# Allegro board lora.brd
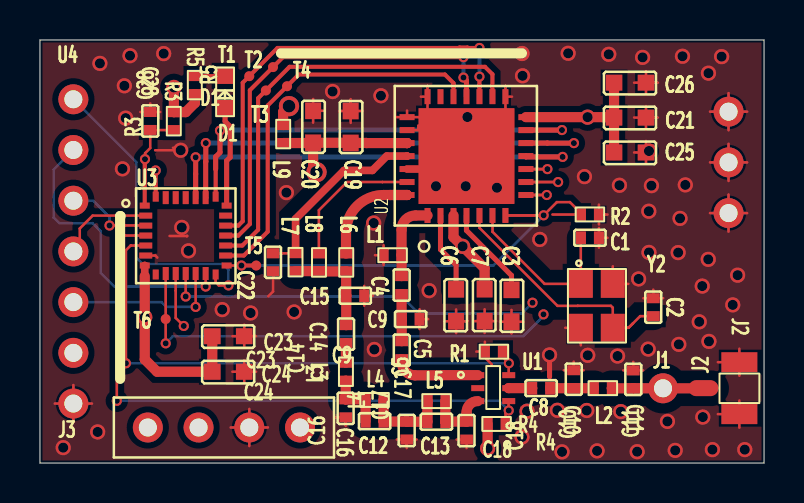
[diagram p0: board, top side]
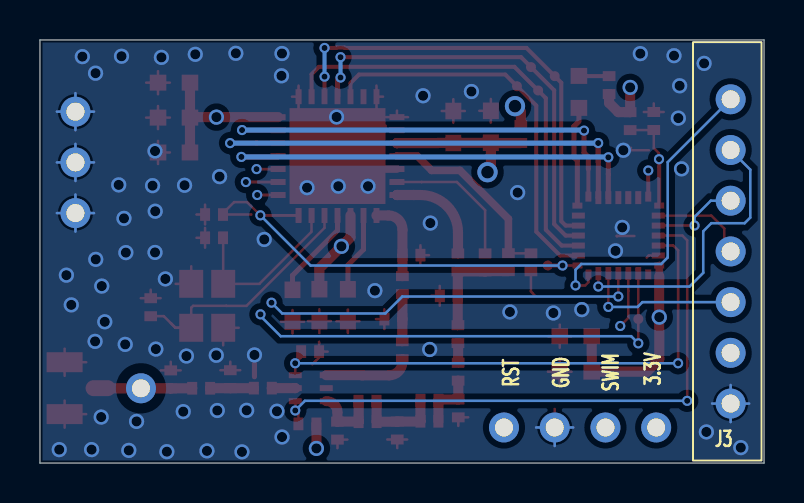
[diagram p1: board, bottom side, seen from below]

Outline 36.25 x 21.19 mm; copper layers: TOP, GND, POWER, BOTTOM. Coordinates in mm from the lower left corner of the outline.
Outline path: 0,21.19 0,0 36.25,0 36.25,21.19 0,21.19

## Placement (name value [footprint] x y rotation side)
C1  15P  [C0402]  27.08 11.28 0 top
C2  15P  [C0402]  30.7 7.36 90 top
C3  0.1uF  [C0603]  23.61 8.68 270 top
C4  4.7p  [C0402]  18.1 9.36 270 top
C5  47p  [C0402]  18.11 6.1 270 top
C6  0.1uF  [C0603]  20.83 7.1 90 top
C7  0.1uF  [C0603]  22.26 7.11 90 top
C8  47p  [C0402]  24.64 3.75 0 top
C9  NC  [C0402]  18.11 7.21 0 top
C10  NC  [C0402]  26.72 4.65 270 top
C11  NC  [C0402]  29.7 4.64 270 top
C12  2.7p  [C0402]  16.3 2.09 0 top
C13  NC  [C0402]  19.39 2.07 0 top
C14  47p  [C0402]  15.32 6.91 270 top
C15  8.2P  [C0402]  15.33 8.38 0 top
C16  15P  [C0402]  15.31 2.29 90 top
C17  12p  [C0402]  18.36 1.18 90 top
C18  4.7p  [C0402]  21.36 1.18 90 top
C19  10uF  [C0603]  15.56 17.63 270 top
C20  0.1uF  [C0603]  13.68 17.64 270 top
C21  10uF  [C0603]  30.34 17.3 180 top
C22  8.2P  [C0402]  11.67 9.61 90 top
C23  10uF  [C0603]  10.23 6.35 180 top
C24  0.1uF  [C0603]  10.23 4.58 180 top
C25  10uF  [C0603]  30.34 15.56 180 top
C26  0.1uF  [C0603]  30.34 19.05 180 top
C28  47p  [C0402]  5.52 17.58 270 top
D1  F5F1  [LED0603]  9.27 17.79 90 top
J1  CON1  [ANT_HOLE]  31.19 3.75 0 top
J2  -  [IPX]  33.21 3.75 270 top
J3  -  [CON4]  5.4 1.78 0 top
L1  18nH  [R0402]  18.1 10.41 180 top
L2  0  [R0402]  27.73 3.75 0 top
L3  22nH  [R0402]  15.31 5.03 270 top
L4  12nH  [R0402]  16.3 3.16 0 top
L5  0  [R0402]  19.41 3.1 0 top
L6  2.2nH  [R0402]  15.33 10.5 270 top
L7  47nH  [R0402]  12.8 9.61 90 top
L8  33nH  [R0402]  13.96 10.5 270 top
L9  33nH  [R0402]  12.17 16.93 270 top
R1  10K  [R0402]  23.17 5.58 180 top
R2  10K  [R0402]  27.08 12.45 0 top
R3  10K  [R0402]  6.7 16.68 90 top
R4  10K  [R0402]  23.31 1.96 180 top
R5  1K  [R0402]  7.76 18.48 90 top
T1  TEST  [TP1]  10.48 19.38 0 top
T2  TEST  [TP1]  11.67 19.83 0 top
T3  TEST  [TP1]  11.31 18.66 0 top
T4  TEST  [TP1]  12.37 18.87 0 top
T5  TEST  [TP1]  10.82 9.89 0 top
T6  TEST  [TP1]  6.29 7.21 0 top
U1  PE4259  [SC-70]  21.92 4.4 0 top
U2  SX1278  [QFN28_LEAD]  19.64 10.77 90 top
U3  STM8L151G6U6  [QFN28_NOLEAD]  7.3 11.39 0 top
U4  -  [E32-TTL-100]  34.17 12.52 90 top
Y2  FTR5092-A2-32MHZ  [CRY_3225]  28.68 8.98 270 top

## Library data of the parts
C1-C26 C28 = CAP NP
D1 = F5F1
J1 = CON1
J2 = IPX
J3 = CON4
L1-L9 = INDUCTOR
R1-R5 = RESISTOR
T1-T6 = TEST
U1 = PE4259
U2 = SX1278
U3 = STM8L151G6U6
U4 = E32-TTL-100
Y2 = CRY_0

## Footprints (pads in the part's own frame, mm; a bottom-side part is the same pattern mirrored in y, then rotated)
ANT_HOLE
  round 1.5 hole 0.9: 1(0,0)
C0402
  rect 0.5x0.635 smd: 1(0,0) 2(0.9,0)
C0603
  rect 0.83x0.8 smd: 1(0,0) 2(1.6,0)
CON4
  round 1.5 hole 0.9: 1(0,0) 2(2.54,0) 3(5.08,0) 4(7.62,0)
CRY_3225
  rect 1.4x1.2 smd: 1(0,-1.6) 2(2.2,-1.6) 3(2.2,0) 4(0,0)
E32-TTL-100
  round 1.5 hole 0.9: 1(5.7,32.5) 2(3.16,32.5) 3(0.62,32.5) 4(-1.92,32.5) 5(-4.46,32.5) 6(-7,32.5) 7(-9.54,32.5) 8(0,-0.3) 9(2.54,-0.3) 10(5.08,-0.3)
IPX
  oval 0.8x1.5 smd: 1(0,0)
  rect 1x1.8 smd: 2(1.3,1.8) 3(-1.3,1.8)
LED0603
  rect 0.8x0.83 smd: 1(0,0) 2(1.6,0)
QFN28_LEAD
  rect 0.75x0.3 smd: 1(1.633,0.237) 2(1.633,-0.413) 3(1.633,-1.063) 4(1.633,-1.713) 5(1.633,-2.363) 6(1.633,-3.013) 7(1.633,-3.663) 15(7.583,-3.663) 16(7.583,-3.013) 17(7.583,-2.363) 18(7.583,-1.713) 19(7.583,-1.063) 20(7.583,-0.413) 21(7.583,0.237)
  rect 0.3x0.75 smd: 8(2.658,-4.688) 9(3.308,-4.688) 10(3.958,-4.688) 11(4.608,-4.688) 12(5.258,-4.688) 13(5.908,-4.688) 14(6.558,-4.688) 22(6.558,1.262) 23(5.908,1.262) 24(5.258,1.262) 25(4.608,1.262) 26(3.958,1.262) 27(3.308,1.262) 28(2.658,1.262)
  rect 4.8x4.8 smd: 29(4.608,-1.713)
QFN28_NOLEAD
  rect 0.5x0.3 smd: 1(-2.05,1.5) 7(-2.05,-1.5) 15(2.05,-1.5) 21(2.05,1.5)
  rect 0.65x0.3 smd: 2(-2,1) 3(-2,0.5) 4(-2,0) 5(-2,-0.5) 6(-2,-1) 16(2,-1) 17(2,-0.5) 18(2,0) 19(2,0.5) 20(2,1)
  rect 0.3x0.5 smd: 8(-1.5,-1.95) 14(1.5,-1.95) 22(1.5,1.95) 28(-1.5,1.95)
  rect 0.3x0.65 smd: 9(-1,-1.9) 10(-0.5,-1.9) 11(0,-1.9) 12(0.5,-1.9) 13(1,-1.9) 23(1,1.9) 24(0.5,1.9) 25(0,1.9) 26(-0.5,1.9) 27(-1,1.9)
R0402
  rect 0.5x0.635 smd: 1(0,0) 2(0.9,0)
SC-70
  rect 0.65x0.3 smd: 1(0,0) 2(0,-0.65) 3(0,-1.3) 4(1.55,-1.3) 5(1.55,-0.65) 6(1.55,0)
TP1
  round 0.5 smd: 1(0,0)

## Nets
GND: C1.2 C2.2 C3.2 C6.1 C7.1 C9.2 C10.1 C11.1 C15.2 C16.1 C17.1 C18.1 C19.1 C20.1 C21.1 C22.1 C23.1 C24.1 C25.1 C26.1 C28.1 J2.2(G#2) J2.3(G#3) J3.3 L1.2 R1.2 R2.2 U2.15(GND#15) U2.21(RFI_HF (GND)) U2.22(RFO_HF (GND)) U2.23(GND#23) U2.26(GND#26) U2.29(GROUND) U3.6(VSS1) U4.7(GND#7) U4.8(GND#8) U4.9(GND#9) U4.10(GND#10) Y2.2(G#2) Y2.4(G#4)
VCC_3.3V: C23.2 C24.2 J3.1 L9.1 R3.2 R5.1 U3.7(VDD1) U4.6(VCC)
VCC_RF: C7.2 C19.2 C20.2 C21.2 C25.2 C26.2 L9.2 R4.2 U2.3(VBAT_ANA) U2.14(VBAT_DIG) U2.24(VBAT_RF)
DIO0: T6.1(TP) U2.8(DIO0) U3.9(PD1)
DIO1: U2.9(DIO1/DCLK) U3.10(PD2)
DIO2: U2.10(DIO2/DATA) U3.11(PD3)
DIO3: U2.11(DIO3) U3.24(PC3)
DIO4: U2.12(DIO4) U3.23(PC2)
DIO5: U2.13(DIO5) U3.22(PC1)
LORA_AUX: U3.12(PB0) U4.5(AUX)
LORA_M0: U3.14(PB2) U4.1(M0)
LORA_M1: U3.13(PB1) U4.2(M1)
LORA_RST: R2.1 T5.1(TP) U2.7(NRESET) U3.15(PB3)
LORA_RXD: U3.3(PA3/UART1_RXD) U4.3(RXD)
LORA_TXD: U3.2(PA2/UART1_TXD) U4.4(TXD)
RST: C28.2 J3.4 R3.1 U3.1(NRST)
RXEN: R4.1 U1.4(CTRL) U3.4(PA4)
SPI_MISO: T1.1(TP) U2.17(MISO) U3.19(PB7/SPI_MISO)
SPI_MOSI: T2.1(TP) U2.18(MOSI) U3.18(PB6/SPI_MOSI)
SPI_NSS: T4.1(TP) U2.19(NSS) U3.16(PB4/SPI_NSS)
SPI_SCK: T3.1(TP) U2.16(SCK) U3.17(PB5/SPI_SCK)
SWIM: J3.2 U3.28(PA0)
TXEN: R1.1 U1.6(VDD) U3.5(PA5)
TXRX_SW: U2.20(RXTX/RF_MOD)
N00901: C4.1 L1.1 U2.1(RFI_LF)
N01117: C4.2 C5.1 C9.1
N01185: C5.2 U1.1(RF1)
N01583: C14.1 C15.1 L6.2 L7.1 L8.2
N01591: C14.2 L3.1
N01595: C12.1 C16.2 L3.2 L4.1
N01599: C12.2 C13.1 C17.2 L4.2 L5.1
N01620: C13.2 C18.2 L5.2 U1.3(RF2)
N01809: C22.2 L7.2 U2.25(VR_PA)
N01879: L8.1 U2.27(PA_BOOST)
N03325: C8.1 U1.5(RFC)
N03329: C8.2 C10.2 L2.1
N03343: C11.2 J1.1 J2.1(ANT) L2.2
N04175: C1.1 U2.6(XTB) Y2.1(IN)
N04189: C2.1 U2.5(XTA) Y2.3(OUT)
N04518: C3.1 U2.4(VR_DIG)
N04749: C6.2 U2.2(VR_ANA)
N12549: L6.1 U2.28(RFO_LF)
N30748: D1.2(ANODE) R5.2
N30752: D1.1(CATHODE) U3.21(PC0)

Pads without a net: U1 2; U3 8 20 25 26 27

## Via types
v1: diameter 0.508, hole 0.305, TOP to BOTTOM, 30 vias
v2: diameter 0.762, hole 0.508, TOP to BOTTOM, 72 vias
v3: diameter 1.016, hole 0.635, TOP to BOTTOM, 2 vias

## Routing (per net, layer and track width the routed paths; a pad name or vN(x,y) marks a point on that pad's centre or on a via; arc(x,y) is an arc through that point)
GND: length 129.6
  TOP w0.127: R2.2 28.41,12.45 ; R2.2 27.98,11.95 ; R2.2 27.98,12.94 ; 19.98,16.68 20.05,16.68 ; 19.98,16.68 20.01,16.71 ; 19.98,16.68 U2.23 ; 20.05,16.68 U2.29 ; 20.05,16.68 20.01,16.71 ; R1.2 22.27,5.29 22.62,4.94 ; R1.2 21.85,5.58 ; R1.2 22.27,6.08 ; 9.55,1.78 J3.3 ; J3.3 10.48,2.71 ; J3.3 10.48,0.85 ; J3.3 11.41,1.78 ; C9.2 19.01,7.7 ; C9.2 19.43,7.21 ; C9.2 19.01,6.71 ; C20.1 13.68,18.24 ; C20.1 13.68,17.05 ; C20.1 14.25,17.64 ; 30.21,8.26 C2.2 ; C2.2 30.7,8.69 ; C2.2 31.2,8.26 ; 23.01,17.3 23.3,17.59 U2.15 ; 9.63,4.58 C24.1 ; C24.1 10.23,5.15 ; C24.1 10.82,4.58 ; C24.1 10.23,4 ; 22.26,6.52 C7.1 ; C7.1 22.84,7.11 ; C7.1 22.26,7.7 ; C7.1 21.68,7.11 ; 15.31,1.86 C16.1 14.81,2.29 ; 23.61,6.48 C3.2 ; C3.2 23.61,7.67 ; C3.2 24.18,7.08 ; C3.2 23.03,7.08 ; 19.4,17.33 U2.22 ; 19.4,17.33 U2.21 ; 19.4,17.33 19.86,16.87 ; 19.4,17.33 19.86,17.33 ; U2.22 18.38,17.65 ; U2.22 17.82,17.33 ; 10.23,5.78 C23.1 ; C23.1 9.63,6.35 ; C23.1 10.23,6.93 ; C23.1 10.82,6.35 ; U4.9 34.47,15.99 ; U4.9 34.47,14.13 ; U4.9 33.54,15.06 ; U4.9 35.4,15.06 ; C6.1 21.41,7.1 ; C6.1 20.26,7.1 ; C6.1 20.83,7.69 ; C6.1 20.83,6.51 ; C19.1 15.56,18.23 ; C19.1 14.98,17.63 ; C19.1 15.56,17.04 ; C19.1 16.13,17.63 ; 27.08,5.9 Y2.2 26.3,6.78 ; 18.36,0.75 C17.1 ; C17.1 17.87,1.18 ; C17.1 18.86,1.18 ; 33.93,2.45 J2.2 ; J2.2 35.01,3.13 ; J2.2 35.01,1.77 ; C25.1 30.34,16.13 ; C25.1 29.75,15.56 ; C25.1 30.34,14.98 ; 7.37,11.37 7.36,11.37 ; U2.15 23.3,18.9 ; U2.15 23.63,18.35 ; U4.10 35.4,17.6 ; U4.10 34.47,18.53 ; U4.10 34.47,16.67 ; U4.10 33.54,17.6 ; 21.36,0.75 C18.1 20.86,1.18 ; C26.1 30.93,19.05 ; C26.1 29.75,19.05 ; C26.1 30.34,19.63 ; C26.1 30.34,18.47 ; 17.2,9.92 L1.2 ; L1.2 17.2,10.91 ; L1.2 16.77,10.41 ; 20.01,16.71 19.86,16.87 ; C11.1 29.7,5.07 ; C11.1 29.21,4.64 ; C11.1 30.2,4.64 ; 30.34,16.73 C21.1 ; C21.1 30.34,17.88 ; C21.1 30.93,17.3 ; C21.1 29.75,17.3 ; 5.03,17.58 C28.1 ; C28.1 5.52,18.01 ; C28.1 6.02,17.58 ; U2.21 19.07,18.35 ; U2.21 19.4,18.9 ; 7.36,11.37 6.49,11.37 ; 7.36,11.37 7.36,11.36 ; 29.45,8.98 Y2.4 28.68,9.85 ; 19.86,16.87 19.86,17.31 ; C15.2 16.23,8.87 ; C15.2 16.23,7.88 ; C15.2 16.66,8.38 ; U2.29 20.33,15.38 18.94,16.76 18.94,16.9 ; U2.29 20.7,14.73 19.81,14.73 ; 6.66,15.79 6.92,15.79 v2(7.04,15.67) 5.77,15.67 ; 35.01,4.37 J2.3 ; J2.3 33.93,5.05 ; J2.3 35.01,5.73 ; C10.1 27.21,4.65 ; C10.1 26.72,5.08 ; C10.1 26.22,4.65 ; C1.2 28.41,11.28 ; C1.2 27.98,10.79 ; C1.2 27.98,11.78 ; 11.43,8.35 11.67,8.59 C22.1 ; 0.74,2.98 U4.7 ; U4.7 1.67,2.05 ; U4.7 2.6,2.98 ; U4.7 1.67,3.91 ; 5.88,10.29 5.77,10.39 U3.6 ; U4.8 35.4,12.52 ; U4.8 33.54,12.52 ; U4.8 34.47,13.45 ; U4.8 34.47,11.59
  TOP w0.254: v2(25.51,5.42) 25.51,4.32
  TOP w0.381: U2.26 19.81,14.73
  GND w0.127: U4.8 34.47,13.45 ; U4.8 33.54,12.52 ; U4.8 34.47,11.59 ; U4.8 35.4,12.52 ; 33.54,15.06 U4.9 ; U4.9 35.4,15.06 ; U4.9 34.47,14.13 ; U4.9 34.47,15.99 ; J3.3 11.41,1.78 ; J3.3 9.55,1.78 ; J3.3 10.48,0.85 ; J3.3 10.48,2.71 ; U4.10 35.4,17.6 ; U4.10 34.47,18.53 ; U4.10 34.47,16.67 ; U4.10 33.54,17.6 ; 0.74,2.98 U4.7 ; U4.7 1.67,3.91 ; U4.7 2.6,2.98 ; U4.7 1.67,2.05
  GND w0.254: v2(30.45,5.71) 30.45,5.71 30.35,5.61
  GND w0.762: 15.33,7.77 18.59,7.77
  BOTTOM w0.127: U4.8 35.4,12.52 ; U4.8 34.47,13.45 ; U4.8 34.47,11.59 ; U4.8 33.54,12.52 ; 33.54,15.06 U4.9 ; U4.9 35.4,15.06 ; U4.9 34.47,15.99 ; U4.9 34.47,14.13 ; 34.47,16.67 U4.10 ; U4.10 34.47,18.53 ; U4.10 33.54,17.6 ; U4.10 35.4,17.6 ; 0.74,2.98 U4.7 ; U4.7 1.67,2.05 ; U4.7 1.67,3.91 ; U4.7 2.6,2.98 ; 10.48,0.85 J3.3 ; J3.3 11.41,1.78 ; J3.3 9.55,1.78
  vias: v2(1.16,0.77) v2(2.89,1.56) v2(3,20.02) v2(4.13,14.74) v2(4.23,18.9) v2(4.29,17.28) v2(4.51,20.4) v2(6.19,20.51) v2(7.1,11.8) v2(7.44,10.63) v2(9.12,7.69) v2(10.55,7.52) v2(12.34,13.55) v2(12.72,7.57) v2(14.65,18.61) v2(16.71,12.02) v2(16.74,5.69) v2(17.07,18.4) v2(19.48,8.64) v2(19.83,13.87) v2(21.31,13.87) v2(21.4,17.33) v2(22.88,13.79) v2(24.13,20.51) v2(24.13,1.31) v2(24.16,19.4) v2(24.38,2.6) v2(25.02,11.2) v2(25.9,2.64) v2(26.14,0.56) v2(26.44,20.52) v2(27.26,14.35) v2(27.42,5.4) v2(27.37,2.63) v2(27.89,0.61) v2(28.47,20.47) v2(28.92,5.36) v2(29.01,13.91) v2(29.08,2.58) v2(29.9,0.57) v2(29.97,9.22) v2(30.17,20.32) v2(30.49,15.63) v2(30.48,12.61) v2(30.49,10.55) v2(30.61,13.89) v2(31.41,2.09) v2(31.8,0.64) v2(31.95,10.54) v2(32.04,12.26) v2(31.98,5.94) v2(32.17,20.38) v2(32.31,13.93) v2(33,7.07) v2(33.15,8.86) v2(33.18,2.3) v2(33.47,19.53) v2(33.46,10.2) v2(33.49,6.1) v2(33.66,0.67) v2(34.12,20.36) v2(34.68,7.92) v2(34.93,9.41) v2(35.28,0.67)
VCC_3.3V: length 21.5
  TOP w0.381: U3.7 5.25,9.36
  TOP w0.508: R5.1 7.76,18.04 7.3,17.58 R3.2 v2(6.7,18.81) ; 5.25,9.36 v2(5.25,7.31) 5.25,5.19 5.86,4.58 C24.2 C23.2 ; v3(12.47,17.88) 12.17,17.58 L9.1
  POWER w0.381: J3.1 6.33,1.78 ; J3.1 5.4,2.71 ; J3.1 4.47,1.78 ; J3.1 5.4,0.85 ; 0.74,5.52 U4.6 ; U4.6 1.67,6.45 ; U4.6 1.67,4.59 ; U4.6 2.6,5.52
VCC_RF: length 21.3
  TOP w0.508: 28.72,19.05 C26.2 C21.2 ; C20.2 13.68,14.74 v3(13.84,14.57) ; C20.2 13.66,16.03 L9.2 ; C20.2 15.55,16.04 15.56,16.03 ; 15.56,16.03 C19.2 15.56,16.03 ; 15.56,16.03 16.34,16.03 16.34,16.03 U2.24 ; C21.2 28.72,17.3 ; C21.2 C25.2 ; C21.2 28.72,17.33 v2(27.41,17.33) U2.14 ; U2.3 20.7,11.31 v2(21.16,10.86) 22.26,9.75 C7.2 ; R4.2 v2(22.41,0.73)
DIO0: length 31.5
  TOP w0.127: U3.9 6.3,7.21 T6.1 v1(6.29,6) ; U2.8 v1(25.37,13.43) U2.8
  POWER w0.127: v1(25.37,13.43) 25.69,13.11 25.69,10.49 25.22,10.03 25.22,8.48 25.21,8.47 v1(25.21,7.45)
  BOTTOM w0.127: v1(6.29,6) 6.65,6.35 24.2,6.35 25.21,7.37 v1(25.21,7.45)
DIO1: length 31.7
  TOP w0.127: 25.8,14.07 25.8,14.08 U2.9 24.33,14.07 25.8,14.07 ; 25.8,14.07 v1(25.94,14.07) ; U3.10 6.8,8.64 6.8,7.27 v1(7.2,6.87)
  POWER w0.127: v1(7.2,6.87) 25.67,6.87 25.94,7.14 v1(25.94,14.07)
DIO2: length 28.8
  TOP w0.127: 25.4,14.72 24.33,14.72 U2.10 25.4,14.73 25.4,14.72 ; 25.4,14.72 v1(25.4,14.72) ; U3.11 v1(7.3,8.34)
  POWER w0.127: v1(24.66,8.03) 24.66,10.51 24.38,10.79 24.38,11.54 24.66,11.81 24.66,14.62 24.75,14.71 25.4,14.71 v1(25.4,14.72)
  BOTTOM w0.127: v1(24.66,8.03) 24.12,7.49 18.96,7.49 18.11,8.34 v1(7.3,8.34)
DIO3: length 23.5
  TOP w0.203: U3.24 7.8,14.48
  TOP w0.254: v1(7.8,15.31) U3.24 ; U2.11 24.33,15.33 v1(26.17,15.33)
  BOTTOM w0.254: v1(26.17,15.33) 7.82,15.33 v1(7.8,15.31)
DIO4: length 23.6
  TOP w0.254: U3.23 8.3,15.1 8.3,15.1 v1(8.3,16.03) ; v1(26.73,16.02) 25.4,16.02 25.4,16.03 U2.12
  BOTTOM w0.254: v1(26.73,16.02) 8.31,16.02 v1(8.3,16.03)
DIO5: length 22.3
  TOP w0.203: U3.22 8.8,14.73
  TOP w0.254: v1(9.01,16.65) 9.01,15.56 8.8,15.34 8.8,14.73 ; v1(26.13,16.68) 26.13,16.68 U2.13
  BOTTOM w0.254: v1(26.13,16.68) 9.04,16.68 v1(9.01,16.65)
LORA_AUX: length 7.9
  TOP w0.127: U3.12 7.79,9.49 v1(7.79,7.82)
  BOTTOM w0.127: U4.5 6.09,8.06 6.33,7.82 v1(7.79,7.82)
LORA_M0: length 16
  TOP w0.127: U3.14 8.8,9.19 8.8,9.05 8.96,8.89 9.43,8.89 v1(9.44,8.9)
  BOTTOM w0.127: v1(9.44,8.9) 9.44,9.68 9.15,9.97 5.15,9.97 4.82,10.3 4.82,15.07 U4.1
LORA_M1: length 14.7
  TOP w0.127: U3.13 v1(8.3,8.84)
  BOTTOM w0.127: U4.2 0.69,14.7 0.69,12.3 0.97,12.01 2.64,12.01 3.04,11.61 3.04,9.53 3.73,8.84 v1(8.3,8.84)
LORA_RST: length 25.3
  TOP w0.127: U3.15 v1(10.09,9.89) ; 25.66,12.45 R2.1 27.08,12.52 26.53,13.07 25.88,13.07 v1(25.21,12.41) ; v1(25.21,12.41) 25.21,12.4 U2.7 23.3,12.4 25.21,12.4 v1(25.21,12.41)
  TOP w0.203: v1(10.09,9.89) T5.1
  BOTTOM w0.127: v1(25.21,12.41) 22.7,9.89 v1(10.09,9.89)
LORA_RXD: length 4.4
  TOP w0.127: U3.3 5.29,11.9 v1(3.48,11.9)
  BOTTOM w0.127: U4.3 2.67,13.14 3.48,12.32 v1(3.48,11.9)
LORA_TXD: length 4.9
  TOP w0.127: U4.4 1.99,10.92 1.99,11.75 2.64,12.39 U3.2
RST: length 28.1
  TOP w0.127: 5.26,14.82 5.26,14.82 5.25,14.8 ; 5.26,14.82 5.26,15.52 5.52,15.78 C28.2 5.53,16.68 R3.1 ; 5.26,14.82 5.26,14.82 v1(5.26,15.22)
  TOP w0.203: 5.26,15.24 5.25,15.22 U3.1
  POWER w0.127: v1(5.26,15.22) 6.12,15.22 6.39,14.96 6.39,14.46 6.36,14.46 4.67,12.77 4.67,7.03 5.18,6.52 5.18,5.15 5.4,4.94 6.39,3.94 12.39,3.94 13.02,3.31 J3.4
RXEN: length 30.6
  TOP w0.127: 23.46,2.63 23.46,3.1 U1.4 ; 23.46,2.63 23.31,2.48 R4.1 ; 23.46,2.63 v1(23.47,2.63) ; U3.4 4.09,11.39 3.85,11.15 v1(3.85,3.12)
  BOTTOM w0.127: v1(3.85,3.12) 22.98,3.12 v1(23.47,2.63)
SPI_MISO: length 22.9
  TOP w0.203: 22,18.35 U2.17 v1(22,19.35) ; v1(22,20.79) 21.42,20.79 21.4,20.81 21,20.81 20.98,20.79 11.89,20.79 T1.1 10.15,19.05 10.15,12.11 9.93,11.89 U3.19
  BOTTOM w0.203: v1(22,19.35) v1(22,20.79)
SPI_MOSI: length 21.6
  TOP w0.203: v1(21.2,20.33) 12.16,20.33 T2.1 10.51,18.67 10.51,11.97 9.93,11.39 U3.18
  TOP w0.254: v1(21.2,19.31) 21.35,19.16 U2.18
  BOTTOM w0.203: v1(21.2,19.31) v1(21.2,20.33)
SPI_NSS: length 19.7
  TOP w0.203: 20.7,18.35 U2.19 20.7,19.03 20.27,19.46 12.95,19.46 T4.1 11.4,17.91 11.4,11.59 10.21,10.39 U3.16
SPI_SCK: length 22.2
  TOP w0.203: U3.17 10.13,10.89 10.92,11.68 10.92,18.27 T3.1 12.49,19.85 22.28,19.85 22.65,19.47 U2.16 22.65,18.35
SWIM: length 16.3
  TOP w0.203: U3.28 v1(5.8,14.65)
  POWER w0.203: J3.2 7.94,1.96 5.97,3.92 5.97,3.95 4.89,5.03 4.89,6.35 4.36,6.89 4.36,13.22 v1(5.8,14.65)
TXEN: length 27.2
  TOP w0.127: U1.6 23.47,4.99 v1(23.47,5) 23.17,5.3 R1.1 ; U3.5 4.54,10.89 4.3,10.66 v1(4.3,5)
  BOTTOM w0.127: v1(23.47,5) v1(4.3,5)
N00901: length 4
  TOP w0.508: C4.1 18.1,10.41 L1.1 18.1,11.7 arc(18.31,12.2) 18.8,12.4 U2.1
N01117: length 2.4
  TOP w0.508: C4.2 18.1,7.21 C9.1 18.11,7.2 C5.1
N01185: length 4.3
  TOP w0.508: C5.2 18.11,5.06 arc(18.3,4.59) 18.77,4.39 20.12,4.39 20.13,4.4 U1.1
N01583: length 5.2
  TOP w0.508: C14.1 15.33,6.91 C15.1 15.33,8.38 L6.2 15.33,9.6 L8.2 13.95,9.61 L7.1
N01591: length 1
  TOP w0.508: C14.2 15.31,6 L3.1
N01595: length 3
  TOP w0.508: L3.2 15.31,4.12 C16.2 16.27,3.19 L4.1 C12.1
N01599: length 4.3
  TOP w0.508: L4.2 C12.2 17.22,2.08 C17.2 18.37,2.07 C13.1 19.39,3.09 L5.1
N01620: length 3.4
  TOP w0.508: 20.3,2.07 C13.2 20.3,2.07 ; 20.3,2.07 20.3,2.08 C18.2 21.36,2.54 arc(21.52,2.94) U1.3 ; 20.3,2.07 20.3,3.09 L5.2
N01809: length 9.7
  TOP w0.127: L7.2 12.79,10.51 C22.2
  TOP w0.381: U2.25 17.36,15.38 16.64,14.66 15.23,14.66 12.8,12.23 L7.2
N01879: length 7.2
  TOP w0.127: U2.27 17.14,14.08 15.38,14.08 13.96,12.66 L8.1
N03325: length 1.2
  TOP w0.508: U1.5 24.64,3.75 C8.1
N03329: length 2.2
  TOP w0.508: C8.2 25.54,3.75 C10.2 27.73,3.75 L2.1
N03343: length 5.4
  TOP w0.508: J2.1 33.6,3.75 33.6,3.74 31.19,3.74 J1.1 29.7,3.75 C11.2 28.63,3.74 L2.2
N04175: length 8.6
  TOP w0.127: U2.6 22.66,12.4 22.66,11.58 25.26,8.98 Y2.1 27.08,11.28 C1.1
N04189: length 13.3
  TOP w0.127: 29.69,7 29.47,6.78 ; 29.69,7 29.47,6.78 ; 29.69,7 30.05,7.36 C2.1 ; 29.47,6.78 Y2.3 ; 29.47,6.78 Y2.3 ; Y2.3 28.68,7.78 28.58,7.88 26.92,7.88 26.92,7.87 25.91,7.87 22,11.78 U2.5
N04518: length 4.7
  TOP w0.254: C3.1 23.61,9.4 21.35,11.65 U2.4
N04749: length 4
  TOP w0.254: C6.2 20.83,9.92 20.05,10.7 U2.2
N12549: length 6
  TOP w0.508: 17.53,13.43 U2.28 17.53,13.43 ; 17.53,13.43 17.2,13.43 arc(15.87,12.87) 15.32,11.54 15.32,10.51 L6.1
N30748: length 1.5
  TOP w0.203: 9.25,19.39 9.25,19.38 7.82,19.38
  TOP w0.254: 9.25,19.39 D1.2 ; R5.2 7.82,19.38
N30752: length 5.1
  TOP w0.254: D1.1 9.27,17.11 9.52,16.86 9.52,15.32 9.35,15.14 U3.21

## Copper pours and planes (outline as drawn; the poured copper is in the pictures)
GND on TOP, BOTTOM: 0.13,0.13 0.13,21.07 36.12,21.07 36.12,0.13
GND on GND: 0.13,0.13 0.13,21.07 36.02,21.07 36.02,0.13
VCC_3.3V on POWER: 0.18,21.03 0.18,0.23 13.11,0.23 13.11,21.03
VCC_RF on POWER: 0.13,13.87 0.13,21.07 14.81,21.07 14.81,13.87
VCC_RF on POWER: 13.41,20.95 13.41,0.15 36.09,0.15 36.09,20.95

## Text on the board
Ref Des/Silkscreen Bottom: 3.3V | SWIM | GND | RST
NCLEGEND-1-4: FIGURE | SIZE | 12.0 | 20.0 | 25.0 | 35.429 | DRILL CHART: TOP to BOTTOM | ALL UNITS ARE IN MILS | PLATED | QTY | 30 | 71 | 2 | 15
